# Altium PCB PCB1.PcbDoc
Units mm, origin at the board's own origin, x right, y up, seen from the top; angles counter-clockwise.
Board outline 69.35 x 47.85 mm, 2 copper layers (Top Layer, Bottom Layer); 3 components, 11 nets, 59 pads, 0 vias.
Unrouted connection lines stored in the file: 3.
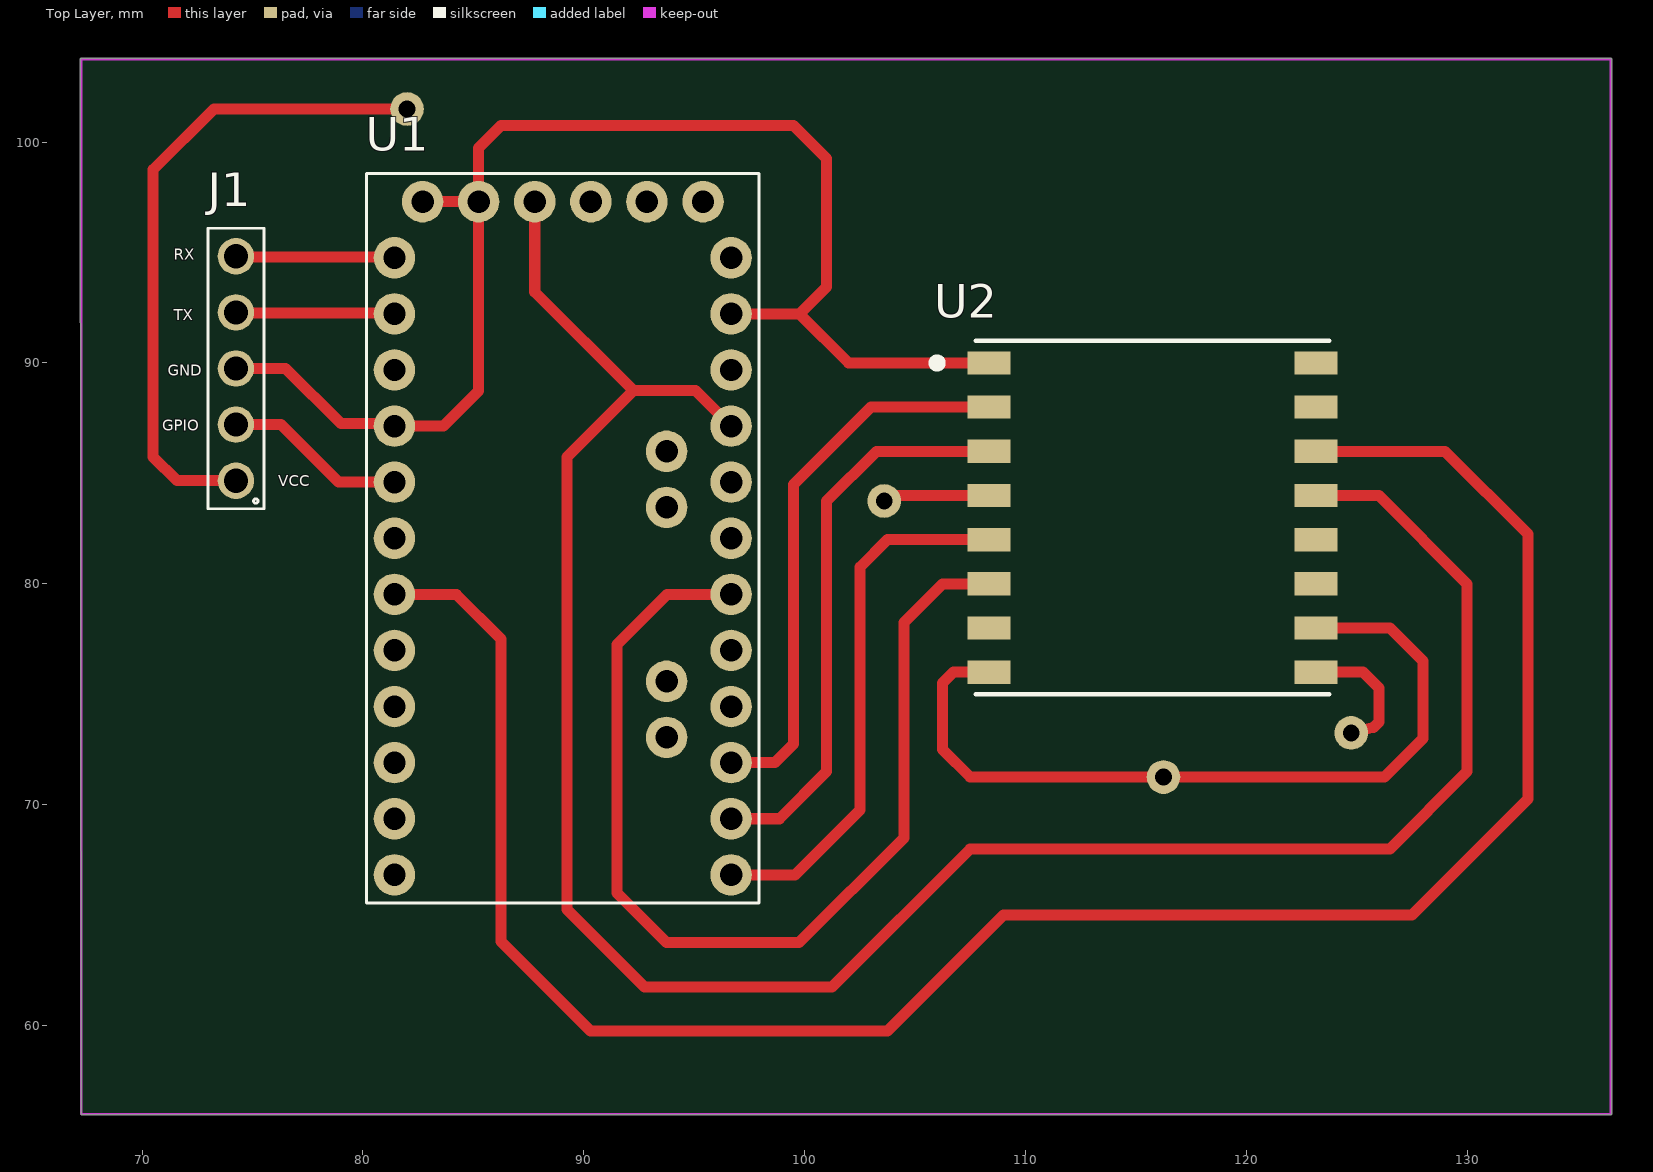
[diagram p0: Top Layer view]
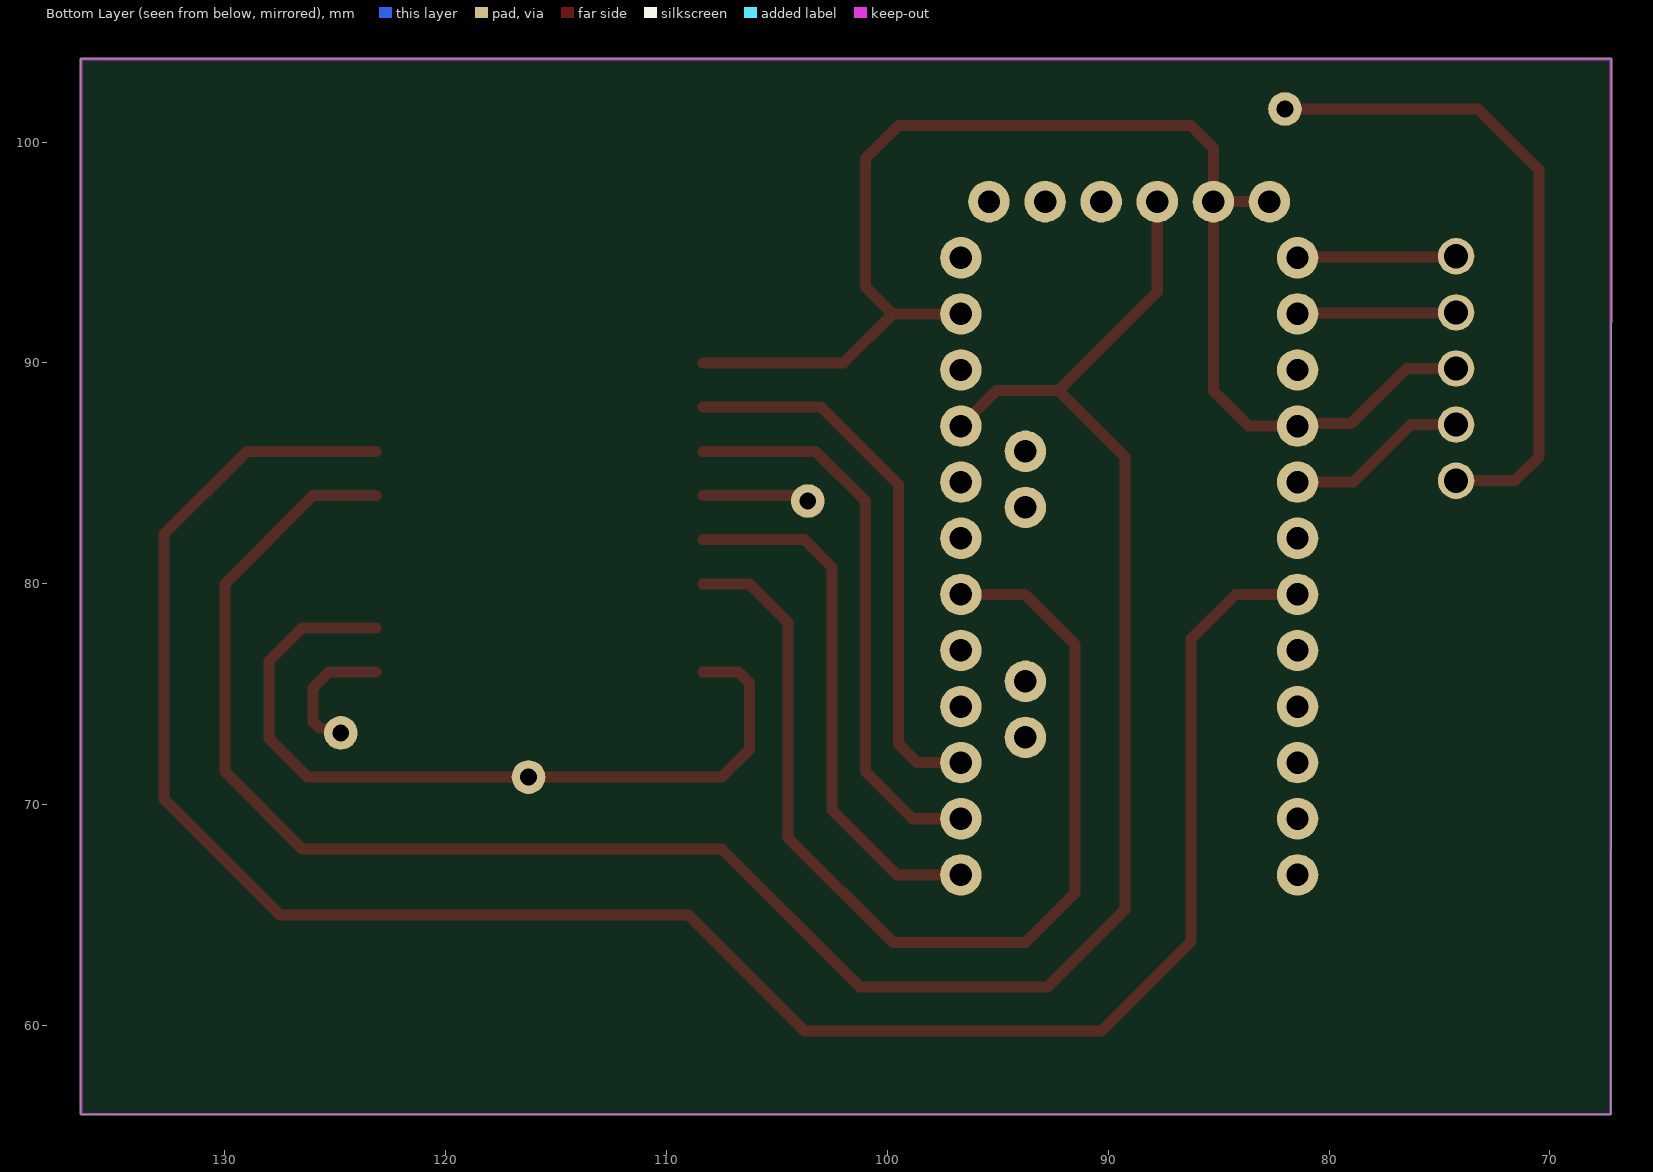
[diagram p1: Bottom Layer view, seen from below]

## Layer stack, top to bottom
Top Solder: solder mask 0.0102, Solder Resist, Dk 3.5
Top Layer: signal copper 0.0356
Dielectric 1: dielectric 0.32, FR-4, Dk 4.8
Bottom Layer: signal copper 0.0356
Bottom Solder: solder mask 0.0102, Solder Resist, Dk 3.5

## Board outline
67.25,55.95 136.5,55.95 136.55,56 136.55,103.75 136.5,103.8 67.25,103.8 67.2,103.75

## Design rules (kind name [scope] priority, off if disabled: settings)
Clearance [All] p1: gap=0.254 ignorepadtopadclearanceinfootprint=FALSE except(0: Arc-Hole Track-Hole SMDPad-Hole THPad-Hole Via-Hole Fill-Hole Poly-Hole Region-Hole Text-Hole)
PolygonConnect [All] p1: connectstyle=Relief reliefconductorwidth=0.254 reliefentries=4 polygonreliefangle="90 Angle" airgapwidth=0.254
RoutingVias [All] p1: holewidth=0.711 width=1.27 viastyle="Through Hole" minholewidth=0.711 minwidth=1.27 maxholewidth=0.711 maxwidth=1.27
SolderMaskExpansion [All] p1: expansion=0.102 istentingtop=FALSE
Width [All] p1: maxlimit=2 minlimit=0.152 preferedwidth=0.5
30 further rules are at their usual default settings.

## Classes and differential pairs
component class LoRa_Test_Board_Sheet: U1 U2

## Components (designator, comment, footprint, x,y, rotation, side; value= is the part's Value field where it differs from the comment)
J1 "61300511121" 61300511121 74.25,89.75 r90 top
U1 "ARDUINO_PRO_MINI" MODULE_ARDUINO_PRO_MINI 89.051,82.063 r0 top
U2 "RFM95W-868S2" XCVR_RFM95W-868S2 115.75,83 r0 top

## Footprints (in the part's own frame and the unit in brackets; to place one, negate y for a bottom-side part, rotate by r counter-clockwise, add the part's x,y. Pads: shape width x height; smd on the part's side, far side on the other; paste and mask are expansions set on the pad)
61300511121 [mm]
  round 1.65 hole 1.1: 1(-5.08,0) 2(-2.54,0) 3(0,0) 4(2.54,0) 5(5.08,0)
  silkscreen extent -6.35,-1.27 6.35,1.27
MODULE_ARDUINO_PRO_MINI [mil]
  round 74 hole 40: JP1_1(250,600) JP1_2(150,600) JP1_3(50,600) JP1_4(-50,600) JP1_5(-150,600) JP1_6(-250,600) JP2_1(185,55) JP2_2(185,155) JP3_1(185,-355) JP3_2(185,-255) JP6_1(300,500) JP6_2(300,400) JP6_3(300,300) JP6_4(300,200) JP6_5(300,100) JP6_6(300,0) JP6_7(300,-100) JP6_8(300,-200) JP6_9(300,-300) JP6_10(300,-400) JP6_11(300,-500) JP6_12(300,-600) JP7_1(-300,-600) JP7_2(-300,-500) JP7_3(-300,-400) JP7_4(-300,-300) JP7_5(-300,-200) JP7_6(-300,-100) JP7_7(-300,0) JP7_8(-300,100) JP7_9(-300,200) JP7_10(-300,300) JP7_11(-300,400) JP7_12(-300,500)
  silkscreen extent -350,-650 350,650
XCVR_RFM95W-868S2 [mm]
  rect 1.95x1.05 smd: 1(-7.4,7) 2(-7.4,5) 3(-7.4,3) 4(-7.4,1) 5(-7.4,-1) 6(-7.4,-3) 7(-7.4,-5) 8(-7.4,-7) 9(7.4,-7) 10(7.4,-5) 11(7.4,-3) 12(7.4,-1) 13(7.4,1) 14(7.4,3) 15(7.4,5) 16(7.4,7)
  silkscreen extent -10.04,-8 8,8, body extent -8,-8 8,8, height 1.8

## Part data
J1: "Connector Header Through Hole 5 position 0.100 (2.54mm)", Package=None, Availability="In Stock", Check_prices=https://www.snapeda.com/parts/61300511121/Wurth+Elektronik/view-part/?ref=eda, MF="WÃ¼rth Elektronik", MP=61300511121, Price=None, Purchase-URL=https://pricing.snapeda.com/search/part/61300511121/?ref=eda, SnapEDA_Link=https://www.snapeda.com/parts/61300511121/Wurth+Elektronik/view-part/?ref=snap
U1: "This board was developed for applications and installations where space is premium and projects are made as permanent set ups. Small, available in 3.3 V and 5 V versions, powered by ATmega328P.", Package=None, Availability="Not in stock", Check_prices=https://www.snapeda.com/parts/Arduino%20Pro%20Mini/Arduino/view-part/?ref=eda, MF=Arduino, MP="Arduino Pro Mini", Price=None, SnapEDA_Link=https://www.snapeda.com/parts/Arduino%20Pro%20Mini/Arduino/view-part/?ref=snap
U2: "General ISM < 1GHz LoRaâ„¢ Transceiver Module 868MHz Antenna Not Included Surface Mount", Package="Non Standard RF Solutions", Availability="In Stock", Check_prices=https://www.snapeda.com/parts/RFM95W-868S2/RF+Solutions/view-part/?ref=eda, MF=RF, MP=RFM95W-868S2, Price=None, Purchase-URL=https://pricing.snapeda.com/search/part/RFM95W-868S2/?ref=eda, SnapEDA_Link=https://www.snapeda.com/parts/RFM95W-868S2/RF+Solutions/view-part/?ref=snap

## Free pads (board coordinates)
  round 1.524 hole 0.762: 2(103.604,83.75) 3(124.75,73.25) 4(116.25,71.25) 7(82,101.5)

## Nets (pads, with @x,y where several pads share a name; then routed paths per layer and width w, separated by ;. In a path a pad name is that pad's centre, name@x,y a point inside that pad or via, vN(x,y) a via of type N, cw(c..) or ccw(c..) an arc to the next point about the centre after c; other vN are vias at no path point)
DIO0: U1.JP7_6 U2.14 | length 95
  Top Layer w0.5: U1.JP7_6 84.227,79.523 86.25,77.5 86.25,63.804 90.304,59.75 103.75,59.75 109,65 127.5,65 132.75,70.25 132.75,82.25 129,86 U2.14
GND: J1.3 pad.4 U1.JP1_5 U1.JP1_6 U1.JP6_2 U1.JP7_9 U2.1 U2.8 U2.10 | length 100.5
  Top Layer w0.5: J1.3 76.5,89.75 79,87.25 81.324,87.25 U1.JP7_9 83.643,87.143 85.241,88.741 U1.JP1_5 ; U1.JP1_6 U1.JP1_5 ; U1.JP6_2@96.698,92.25 U1.JP6_2 99.777,92.223 ; U2.8 106.75,76 106.25,75.5 106.25,72.5 107.5,71.25 126.25,71.25 128,73 128,76.5 126.5,78 U2.10 ; U2.1 102,90 99.777,92.223 ; U1.JP1_5 85.241,99.741 86.25,100.75 99.5,100.75 101,99.25 101,93.446 99.777,92.223
GPIO: J1.2 U1.JP7_8 | length 8.3
  Top Layer w0.5: J1.2 76.29,87.21 78.897,84.603 U1.JP7_8
MISO: U1.JP6_10 U2.2 | length 25.2
  Top Layer w0.5: U1.JP6_10 98.653,71.903 99.5,72.75 99.5,84.5 103,88 U2.2
MOSI: U1.JP6_11 U2.3 | length 25.7
  Top Layer w0.5: U1.JP6_11 98.863,69.363 101,71.5 101,83.75 103.25,86 U2.3
RST: U1.JP6_7 U2.6 | length 47.6
  Top Layer w0.5: U1.JP6_7 93.773,79.523 91.5,77.25 91.5,66 93.75,63.75 99.75,63.75 104.5,68.5 104.5,78.25 106.25,80 U2.6
RX: J1.5 U1.JP7_12 | length 7.2
  Top Layer w0.5: J1.5 74.283,94.797 81.398,94.797 U1.JP7_12
SCK: pad.2 U1.JP6_9 U2.4 | length 5
  Top Layer w0.5: pad.2@103.5,83.75 103.708,83.75 103.958,84 U2.4
SS: U1.JP6_12 U2.5 | length 24.4
  Top Layer w0.5: U1.JP6_12 99.573,66.823 102.5,69.75 102.5,80.75 103.75,82 U2.5
TX: J1.4 U1.JP7_11 | length 7.2
  Top Layer w0.5: J1.4 74.283,92.257 81.398,92.257 U1.JP7_11
VCC: J1.1 pad.7 U1.JP1_4 U1.JP6_4 U2.13 | length 133.3
  Top Layer w0.5: J1.1 71.58,84.67 70.5,85.75 70.5,98.75 73.25,101.5 pad.7 ; U1.JP1_4 87.781,93.219 92.25,88.75 ; U1.JP6_4 95.064,88.75 92.25,88.75 ; U2.13 126,84 130,80 130,71.5 126.5,68 107.5,68 101.25,61.75 92.75,61.75 89.25,65.25 89.25,85.75 92.25,88.75
pads on no net: U1.JP1_1 U1.JP1_2 U1.JP1_3 U1.JP2_1 U1.JP2_2 U1.JP3_1 U1.JP3_2 U1.JP6_1 U1.JP6_3 U1.JP6_5 U1.JP6_6 U1.JP6_8 U1.JP7_1 U1.JP7_2 U1.JP7_3 U1.JP7_4 U1.JP7_5 U1.JP7_7 U1.JP7_10 U2.7 U2.9 U2.11 U2.12 U2.15 U2.16
copper on no net: | length 6.1
  Top Layer w0.5: 123.15,76 125.292,76 126,75.292 126,73.75 125.75,73.5 124.75,73.25

## Keep-outs
Keep-Out Layer:
  lines w0.1: 67.25,56 67.25,103.75 69.75,103.75 136.5,103.75 136.5,56 67.25,56

## Silkscreen, mask and mechanical layers (free items; w line width, h text height)
Top Overlay:
  text "RX" at 71.425,94.675 h0.5
  text "TX" at 71.425,91.925 h0.5
  text "GND" at 71.175,89.425 h0.5
  text "GPIO" at 70.925,86.925 h0.5
  text "VCC" at 76.175,84.425 h0.5